# EAGLE board axiom_beta_shield_HDMI_v0.2.79a686cb (EAGLE 7.7.0)
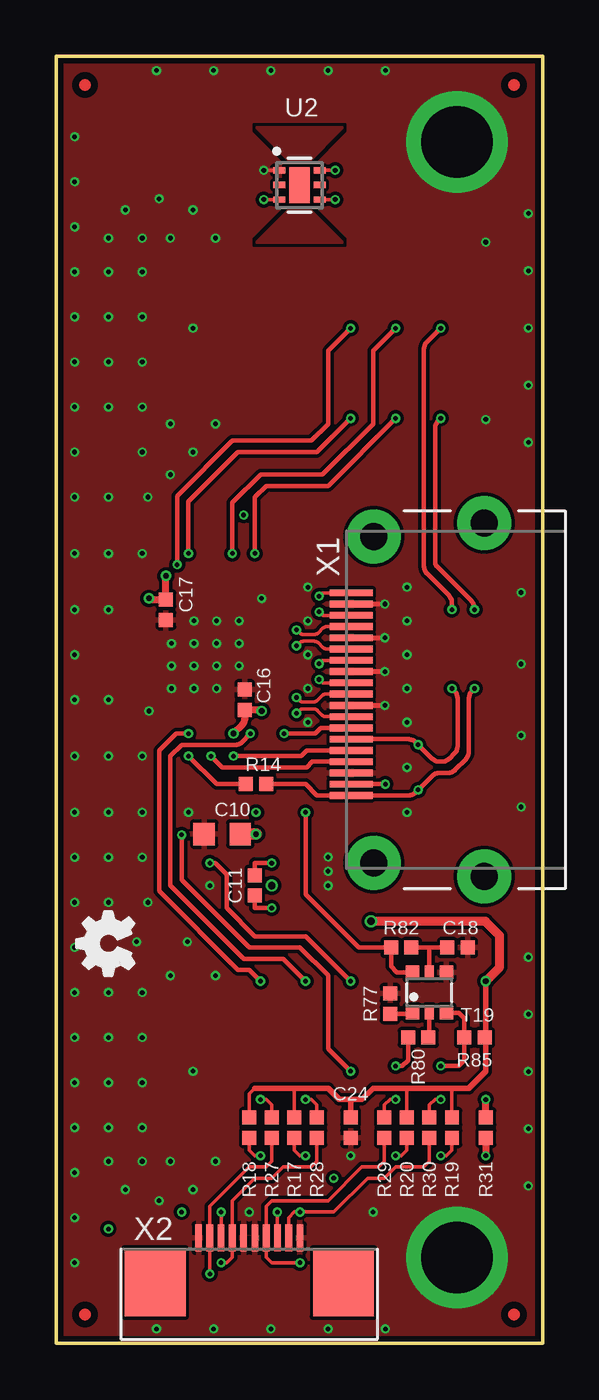
[diagram p0: board, top side]
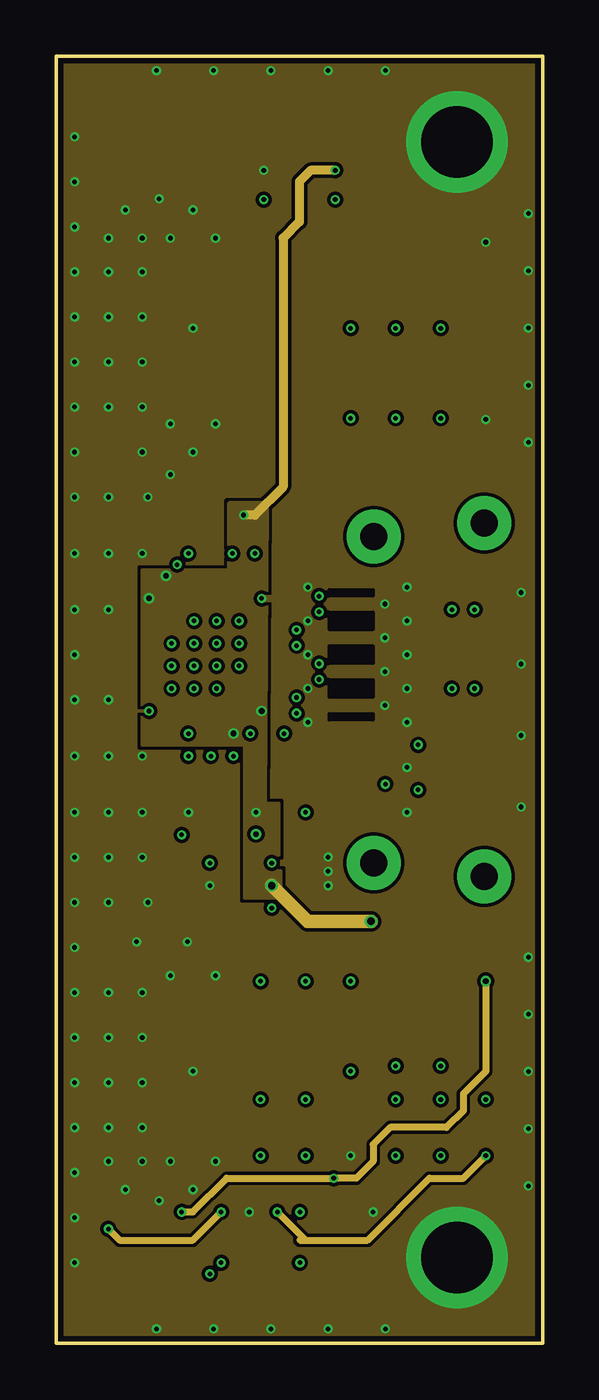
[diagram p1: board, inner layer Route2]
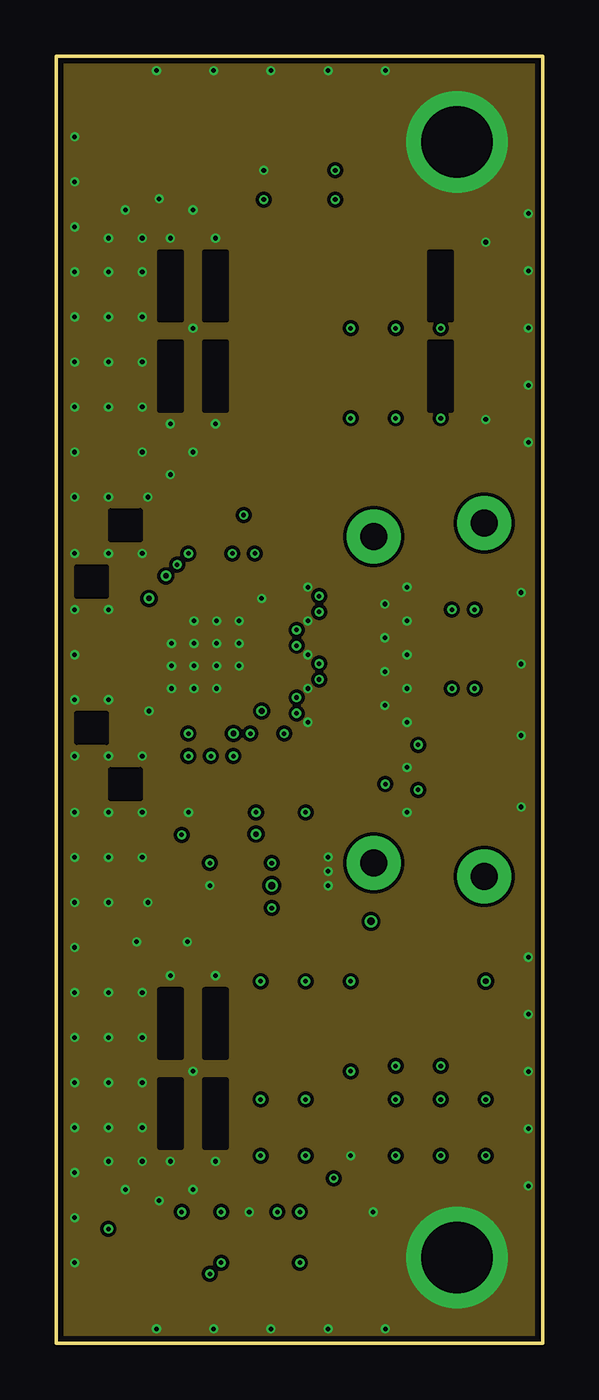
[diagram p2: board, inner layer Route15]
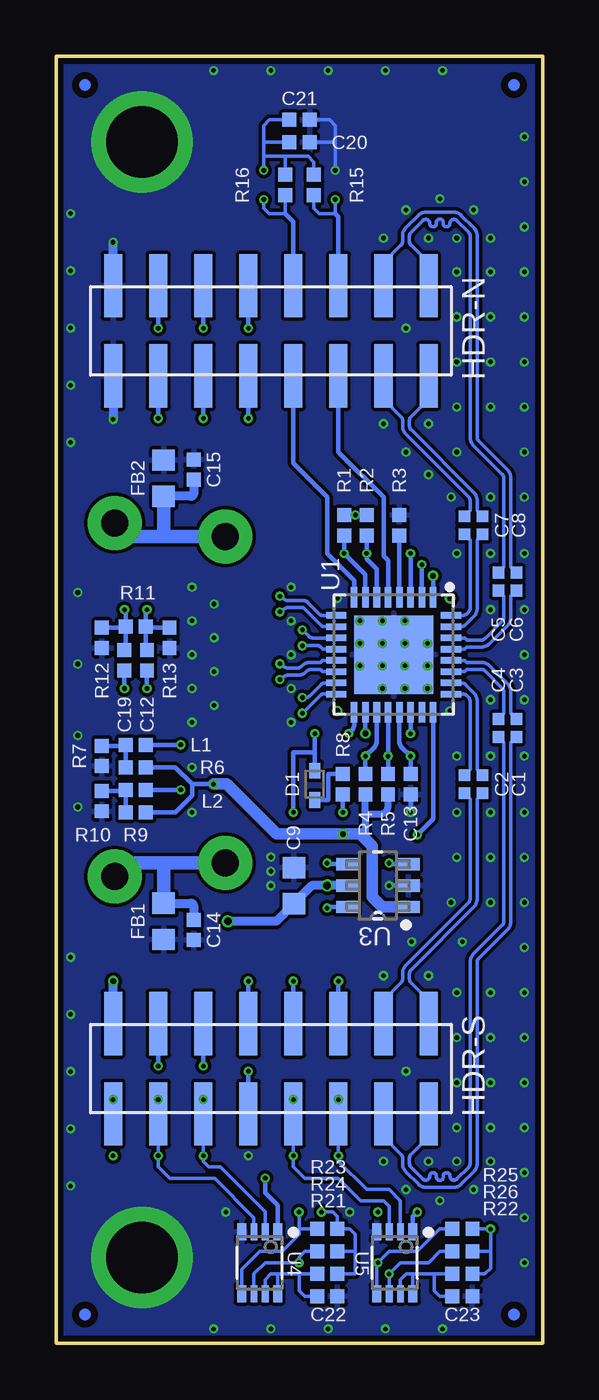
[diagram p3: board, bottom side, seen from below]

Size 21.59 x 57.15 mm. Coordinates in mm from the lower left corner, seen from the top.
Outline: 21.59,57.15 0,57.15 0,0 21.59,0 21.59,57.15
Copper layers (1*2*15*16): Top 0.035559375mm / dielectric 0.17018125mm / Route2 0.01778125mm / dielectric 47mil / Route15 0.01778125mm / dielectric 0.17018125mm / Bottom 0.035559375mm
Design rules "OSHPark-4layer-tuned *": minimum track width 5mil, minimum drill 10mil, track to track 5mil, track to pad 5mil, pad to pad 5mil, via to via 5mil, smd to smd 0mil, copper to edge 10mil, drill to drill 6mil, minimum pad ring 4mil, minimum via ring 4mil, stop-mask expansion 2mil, vias tented up to drill 50mil, thermal gap 6mil
Net classes: 0 default: width 0.152 mm, drill 0.203 mm, clearance 0.152 mm; 1 power: width 0.203 mm, drill 0.254 mm, clearance 0.203 mm; 2 LVDS: width 0.152 mm, drill 0.203 mm, clearance 0.152 mm
tKeepout: area 15.3,50.8 to 20.3,55.8; area 15.3,1.3 to 20.3,6.3
bKeepout: area 15.3,50.8 to 20.3,55.8; area 15.3,1.3 to 20.3,6.3
tRestrict: area 19.8,0.7 to 20.9,1.8; area 19.8,55.3 to 20.9,56.4; area 0.7,55.3 to 1.8,56.4; area 0.7,0.7 to 1.8,1.8; area 8.5,4.6 to 8.7,4.8
bRestrict: area 19.8,0.7 to 20.9,1.8; area 19.8,55.3 to 20.9,56.4; area 0.7,55.3 to 1.8,56.4; area 0.7,0.7 to 1.8,1.8

## Footprints (pad centres in the part's own frame; a part is rotated, then mirrored left to right if it is on the bottom)
0402-C = smd 0.52 x 0.52: 1 -0.4,0; 2 0.4,0
0603-B = smd 0.95 x 1: 1 -0.8,0; 2 0.8,0
0402-B = smd 0.62 x 0.62: 1 -0.45,0; 2 0.45,0
SOD523 = smd 0.7 x 0.5: A 0.7,0; C -0.6,0
2X08M_SMD = smd 0.8 x 2.8: 1 -7,-2; 2 -7,2; 3 -5,-2; 4 -5,2; 5 -3,-2; 6 -3,2; 7 -1,-2; 8 -1,2; 9 1,-2; 10 1,2; 11 3,-2; 12 3,2; 13 5,-2; 14 5,2; 15 7,-2; 16 7,2
SOT363 = smd 0.6 x 0.6: 1 -0.75,-0.9; 3 0.75,-0.9; 4 0.75,0.9; 6 -0.75,0.9 | smd 0.4 x 0.6: 2 0,-0.9; 5 0,0.9
HVQFN32 = smd 0.9 x 0.29: 1 -2.55,1.75; 2 -2.55,1.25; 3 -2.55,0.75; 4 -2.55,0.25; 5 -2.55,-0.25; 6 -2.55,-0.75; 7 -2.55,-1.25; 8 -2.55,-1.75; 17 2.55,-1.75; 18 2.55,-1.25; 19 2.55,-0.75; 20 2.55,-0.25; 21 2.55,0.25; 22 2.55,0.75; 23 2.55,1.25; 24 2.55,1.75 | smd 0.29 x 0.9: 9 -1.75,-2.55; 10 -1.25,-2.55; 11 -0.75,-2.55; 12 -0.25,-2.55; 13 0.25,-2.55; 14 0.75,-2.55; 15 1.25,-2.55; 16 1.75,-2.55; 25 1.75,2.55; 26 1.25,2.55; 27 0.75,2.55; 28 0.25,2.55; 29 -0.25,2.55; 30 -0.75,2.55; 31 -1.25,2.55; 32 -1.75,2.55 | smd 3.5 x 3.5: EP 0,0
CUDFN6 = smd 0.28 x 0.52: 1 -0.65,-0.9; 2 0,-0.9; 3 0.65,-0.9; 4 0.65,0.9; 5 0,0.9; 6 -0.65,0.9 | smd 1.6 x 0.9: 7 0,0
DBV = smd 0.55 x 1: 1 -0.95,-1.35; 2 0,-1.35; 3 0.95,-1.35; 4 0.95,1.35; 5 0,1.35; 6 -0.95,1.35
VSSOP-8 = smd 0.75 x 0.4: 1 -1.375,0.8; 4 -1.375,-0.8; 5 1.375,-0.8; 8 1.375,0.8 | smd 0.75 x 0.3: 2 -1.375,0.25; 3 -1.375,-0.25; 6 1.375,-0.25; 7 1.375,0.25
10029449-X01XLF = smd 0.3 x 1.9: 1 4.75,8.5; 2 4.25,8.5; 3 3.75,8.5; 4 3.25,8.5; 5 2.75,8.5; 6 2.25,8.5; 7 1.75,8.5; 8 1.25,8.5; 9 0.75,8.5; 10 0.25,8.5; 11 -0.25,8.5; 12 -0.75,8.5; 13 -1.25,8.5; 14 -1.75,8.5; 15 -2.25,8.5; 16 -2.75,8.5; 17 -3.25,8.5; 18 -3.75,8.5; 19 -4.25,8.5 | drill 1.2 pad 2.4: Z1 -7.25,7.5; Z2 -7.85,2.6; Z3 7.85,2.6; Z4 7.25,7.5
68711014022 = smd 0.3 x 1.2: 1 -2.25,0.6; 2 -1.75,0.6; 3 -1.25,0.6; 4 -0.75,0.6; 5 -0.25,0.6; 6 0.25,0.6; 7 0.75,0.6; 8 1.25,0.6; 9 1.75,0.6; 10 2.25,0.6 | smd 2.7 x 3: 11 -4.18,-1.38; 12 4.18,-1.38

## Placement (x,y rotation side)
C1  100n  [0402-C]  2.66,24.82 270 bottom
C2  100n  [0402-C]  3.46,24.82 270 bottom
C3  100n  [0402-C]  1.16,27.32 270 bottom
C4  100n  [0402-C]  1.96,27.32 270 bottom
C5  100n  [0402-C]  1.96,33.83 90 bottom
C6  100n  [0402-C]  1.16,33.83 90 bottom
C7  100n  [0402-C]  3.46,36.33 90 bottom
C8  100n  [0402-C]  2.66,36.33 90 bottom
C9  2u2  [0603-B]  11.04,20.32 90 bottom
C10  10u  [0603-B]  7.36,22.61 180 top
C11  220n  [0402-B]  8.81,20.32 90 top
C12  [0402-B]  17.56,30.32 90 bottom  (not fitted)
C13  1-10n  [0402-B]  5.86,24.82 270 bottom  (not fitted)
C14  10n  [0402-B]  15.49,18.35 270 bottom
C15  10n  [0402-B]  15.49,38.8 90 bottom
C16  100n  [0402-B]  8.36,28.57 90 top
C17  100n  [0402-B]  4.86,32.58 270 top
C18  47p  [0402-B]  17.81,17.57 0 top
C19  [0402-B]  18.56,30.32 90 bottom  (not fitted)
C20  100n  [0402-B]  10.79,53.33 0 bottom
C21  10u  [0402-B]  10.79,54.33 0 bottom
C22  100n  [0402-B]  9.56,2.07 0 bottom
C23  100n  [0402-B]  3.56,2.07 0 bottom
C24  10u  [0402-B]  13.06,9.57 270 top
D1  [SOD523]  10.12,24.82 270 bottom
FB1  [0603-B]  16.83,18.73 270 bottom
FB2  [0603-B]  16.83,38.42 90 bottom
HDR-N  [2X08M_SMD]  12.06,44.96 0 bottom  (not fitted)
HDR-S  [2X08M_SMD]  12.06,12.19 0 bottom  (not fitted)
L1  [0402-B]  18.06,26.57 180 bottom  (not fitted)
L2  [0402-B]  18.06,24.57 180 bottom  (not fitted)
LOGO1  OSHW_LOGO_FILLX0100-NT  [OSHW_FILLX100_NOTEXT]  3.44,16.34 90 top
R1  2k2  [0402-B]  8.81,36.33 270 bottom
R2  2k2  [0402-B]  7.81,36.33 270 bottom
R3  12k4  [0402-B]  6.36,36.33 90 bottom
R4  2k2  [0402-B]  7.86,24.82 90 bottom
R5  2k2  [0402-B]  6.86,24.82 90 bottom
R6  [0402-B]  18.06,25.57 180 bottom  (not fitted)
R7  [0402-B]  19.56,26.07 270 bottom  (not fitted)
R8  [0402-B]  8.86,24.82 90 bottom
R9  [0402-B]  18.06,23.57 180 bottom  (not fitted)
R10  [0402-B]  19.56,24.07 270 bottom  (not fitted)
R11  [0402-B]  18.06,31.82 180 bottom  (not fitted)
R12  [0402-B]  19.56,31.32 270 bottom  (not fitted)
R13  [0402-B]  16.56,31.32 270 bottom  (not fitted)
R14  [0402-B]  8.86,24.82 0 top  (not fitted)
R15  1k  [0402-B]  10.16,51.44 270 bottom
R16  1k  [0402-B]  11.43,51.44 270 bottom
R17  4k7  [0402-B]  10.56,9.57 270 top
R18  4k7  [0402-B]  8.56,9.57 270 top
R19  4k7  [0402-B]  17.56,9.57 270 top
R20  4k7  [0402-B]  15.56,9.57 270 top
R21  4k7  [0402-B]  9.56,3.07 180 bottom
R22  4k7  [0402-B]  3.56,3.07 180 bottom
R23  4k7  [0402-B]  9.56,5.07 180 bottom
R24  4k7  [0402-B]  9.56,4.07 180 bottom
R25  4k7  [0402-B]  3.56,5.07 180 bottom
R26  4k7  [0402-B]  3.56,4.07 180 bottom
R27  100R  [0402-B]  9.56,9.57 270 top  (not fitted)
R28  100R  [0402-B]  11.56,9.57 270 top  (not fitted)
R29  100R  [0402-B]  14.56,9.57 270 top  (not fitted)
R30  100R  [0402-B]  16.56,9.57 270 top  (not fitted)
R31  0R  [0402-B]  19.06,9.57 90 top
R77  100  [0402-B]  14.81,15.07 270 top
R80  10k  [0402-B]  16.06,13.57 180 top
R82  1M  [0402-B]  15.31,17.57 180 top
R85  100k  [0402-B]  18.56,13.57 0 top
T19  PMBT3904SY  [SOT363]  16.56,15.57 0 top
U1  PTN3363  [HVQFN32]  6.61,30.57 270 bottom
U2  NOA1305  [CUDFN6]  10.79,51.44 270 top
U3  REG710-DBV  [DBV]  7.31,20.32 90 bottom
U4  GTL2002DC  [VSSOP-8]  12.56,3.57 270 bottom
U5  GTL2002DC  [VSSOP-8]  6.56,3.57 270 bottom
U$1  AXIOM_LOGO459X70  [AXIOM_LOGO_459X70]  5.15,46.83 0 top
X1  HDMI-10029449  [10029449-X01XLF]  21.59,28.57 90 top
X2  68711014022  [68711014022]  8.56,4.07 0 top

## Library data of the parts
C1-C24 FB1 FB2 L1 L2 R1-R31 R77 R80 R82 R85 = generic-rcl
D1 = diode
HDR-N HDR-S = pincon
LOGO1 = ohw-logo
T19 = transistor
U1 = ptn3363
U2 = noa1305
U3 = reg710
U4 U5 = gtl2002
U$1 = logos_apertus_axiom
X1 = hdmi
X2 = eiCan_03_ZIF_Connectors_Flat_Flexible_Cable

## Nets
3V3: C9.1 C16.1 C17.1 C20.1 C21.1 C24.1 HDR-S.2 R1.1 R2.1 R8.1 R15.1 R16.1 R17.1 R18.1 R19.1 R20.1 R85.2 U1.1 U1.18 U2.6 U3.5 U4.1 U5.1
5V0: C10.1 R4.1 R5.1 R6.1 R9.1 U3.1 X1.18
CLOCK_N [LVDS]: U1.16 X1.12
CLOCK_P [LVDS]: U1.15 X1.10
DATA0_N [LVDS]: U1.14 X1.9
DATA0_P [LVDS]: U1.13 X1.7
DATA1_N [LVDS]: U1.12 X1.6
DATA1_P [LVDS]: U1.11 X1.4
DATA2_N [LVDS]: U1.10 X1.3
DATA2_P [LVDS]: U1.9 X1.1
GND: C9.2 C10.2 C13.2 C14.2 C15.2 C16.2 C17.2 C18.2 C20.2 C21.2 C22.2 C23.2 C24.2 FB1.2 FB2.2 HDR-N.1 HDR-N.2 R3.2 R7.2 R10.2 R12.2 R13.2 R77.1 T19.4 U1.EP U2.1 U3.2 U4.4 U5.4 X1.2 X1.5 X1.8 X1.11 X1.17 X2.1 X2.5 X2.6 X2.10
HDMI_CEC: D1.C R82.2 T19.6 X1.13
HDMI_SCL: R4.2 U1.19 X1.15
HDMI_SDA: R5.2 U1.20 X1.16
HEAC+: C12.1 L1.1 X1.14
HEAC-: C19.1 L2.1 R14.2 X1.19
HPD: C13.1 R14.1 U1.21
IN_D1_N [LVDS]: C2.1 U1.25
IN_D1_P [LVDS]: C1.1 U1.26
IN_D2_N [LVDS]: C4.1 U1.27
IN_D2_P [LVDS]: C3.1 U1.28
IN_D3_N [LVDS]: C6.1 U1.29
IN_D3_P [LVDS]: C5.1 U1.30
IN_D4_N [LVDS]: C8.1 U1.31
IN_D4_P [LVDS]: C7.1 U1.32
N$1: L1.2 R6.2 R7.1
N$2: L2.2 R9.2 R10.1
N$6: C22.1 R21.2 U4.7 U4.8
N$7: C23.1 R22.2 U5.7 U5.8
N$23: C15.1 FB2.1 X1.Z3 X1.Z4
N$24: C11.1 U3.6
N$25: C11.2 U3.4
N$26: C14.1 FB1.1 X1.Z1 X1.Z2
N$27: R3.1 U1.4
N$45: D1.A R8.2
N$100: R77.2 T19.1
N$101: C18.1 R82.1 T19.5
N$102: R80.1 T19.2
S_IO1: R26.2 R27.2 U5.6 X2.2
S_IO3: R25.2 R28.2 U5.5 X2.4
S_IO7: R24.2 R29.2 U4.6 X2.7
S_IO9: R23.2 R30.2 U4.5 X2.9
SH_N_IO0: HDR-N.12 R15.2 U2.3
SH_N_IO1: HDR-N.11 U1.5
SH_N_IO2: HDR-N.10 R16.2 U2.4
SH_N_IO3: HDR-N.9 U1.8
SH_N_IO4: HDR-N.8 U1.2
SH_N_IO5: HDR-N.7 U1.3
SH_N_IO6: HDR-N.6 R2.2 U1.6
SH_N_IO7: HDR-N.5 R1.2 U1.7
SH_N_IO8: C12.2 HDR-N.4 R11.1 R13.1
SH_N_IO9: C19.2 HDR-N.3 R11.2 R12.1
SH_S_IO0: HDR-S.12 U1.22
SH_S_IO1: HDR-S.11 R18.2 R27.1 U5.2
SH_S_IO2: HDR-S.10 U1.17
SH_S_IO3: HDR-S.9 R17.2 R28.1 U5.3
SH_S_IO4: HDR-S.8 U3.3
SH_S_IO5: HDR-S.7 U1.24
SH_S_IO6: HDR-S.6 R80.2
SH_S_IO7: HDR-S.5 R20.2 R29.1 U4.2
SH_S_IO8: HDR-S.4 R85.1 T19.3
SH_S_IO9: HDR-S.3 R19.2 R30.1 U4.3
VDD: HDR-S.1 R31.2
VIO13: R22.1 R25.1 R26.1 X2.3
VIO79: R21.1 R23.1 R24.1 R31.1 X2.8
XX1_N: C6.2 HDR-N.14
XX1_P: C5.2 HDR-N.16
XX2_N: C7.2 HDR-N.13
XX2_P: C8.2 HDR-N.15
XX3_N: C4.2 HDR-S.15
XX3_P: C3.2 HDR-S.13
XX4_N: C1.2 HDR-S.16
XX4_P: C2.2 HDR-S.14

## Tracks (layer width: path | path; a pad name or v marks a point on that pad's centre or on a via)
3V3  (via drill 0.2, 0.25, 0.33)
  Top 0.152: U2.6 v12.38,52.09 | R18.1 8.56,11.07 8.81,11.32 | R17.1 10.56,11.32 | R20.1 15.56,11.32 | R19.1 17.56,11.32
  Top 0.203: 19.06,13.62 R85.2
  Top 0.254: v19.06,16.07 19.06,13.62 19.06,12.07 18.31,11.32 17.56,11.32 15.56,11.32 14.06,11.32 13.56,10.82 13.06,10.82 | 13.06,10.82 12.56,10.82 12.06,11.32 10.56,11.32 8.81,11.32 | C24.1 13.06,10.82
  Top 0.305: v4.11,33.08 4.16,33.02 C17.1 v4.86,34.08 | v9.11,28.07 9.06,28.12 C16.1 8.36,27.73 arc-45 8.25,27.46 v7.86,27.07
  Top 0.406: v19.06,16.07 19.68,16.7 19.68,18.1 19.05,18.73 v13.97,18.73
  Route2 0.305: v5.56,5.82 6.06,5.82 7.56,7.32 v12.31,7.32 13.31,7.32 14.06,8.07 14.06,8.82 14.81,9.57 17.31,9.57 18.06,10.32 18.06,11.07 19.06,12.07 v19.06,16.07
  Route2 0.406: v12.38,52.09 11.29,52.09 10.79,51.59 10.79,49.8 10.06,49.08 10.06,38.02 R1.1 v8.31,36.77
  Route2 0.61: v9.56,20.32 11.16,18.73 v13.97,18.73
  Bottom 0.152: R16.1 11.43,52.7 | 11.43,52.7 12.38,52.7 | 12.38,52.7 v12.38,52.09 | 11.43,52.7 10.41,52.7 10.16,52.45 R15.1 | 12.38,52.7 12.38,53.34 | 12.38,53.34 C20.1 | C21.1 12.13,54.33 12.38,54.08 12.38,53.34
  Bottom 0.203: U1.18 v7.86,27.07 | U1.1 v4.86,34.08 | R2.1 v8.31,36.77 R1.1 | R8.1 v8.86,23.57 | U5.1 5.76,5.62 v5.56,5.82 | U4.1 11.76,6.12 12.31,6.68 v12.31,7.32
  Bottom 0.406: U3.5 v9.56,20.32 10.24,20.32 C9.1 11.84,18.73 v13.97,18.73 | HDR-S.2 v19.06,16.07
  pour Route2: 3.81,26.57 3.81,34.33 7.66,34.33 7.66,37.27 arc-90 7.71,37.33 9.36,37.33 9.27,23.98 9.86,23.98 9.86,21.67 9.27,21.67 9.27,20.98 9.96,20.98 9.96,19.79 8.36,19.79 8.36,26.57
5V0  (via drill 0.2, 0.25)
  Top 0.203: X1.18 v14.61,24.82
  Top 0.508: v8.86,22.61 C10.1
  Bottom 0.203: v14.61,24.82 15.56,24.82 | 15.56,24.82 16.31,25.57 R6.1 | 15.56,24.82 15.56,24.32 16.31,23.57 R9.1
  Bottom 0.305: 7.86,23.49 R4.1 | R5.1 6.86,23.84 arc90 7.21,23.49 7.86,23.49 | 7.86,23.49 7.86,22.68 7.94,22.61
  Bottom 0.508: v14.61,24.82 14.03,24.82 11.81,22.61 v8.86,22.61 8.1,22.61 | 8.1,22.61 7.94,22.61 | U3.1 7.11,19.38 7.56,19.82 7.56,22.07 8.1,22.61
CLOCK_N  (via drill 0.2)
  Top 0.152: X1.12 11.97,27.82 arc-45 11.79,27.9 11.59,28.1 arc45 11.41,28.17 10.97,28.17 arc45 10.79,28.1 v10.66,27.97
  Bottom 0.152: v10.66,27.97 9.85,28.79 arc45 9.76,28.82 U1.16
CLOCK_P  (via drill 0.2)
  Top 0.152: X1.10 11.97,28.82 arc45 11.79,28.75 11.59,28.55 arc-45 11.41,28.48 10.97,28.48 arc-45 10.79,28.55 v10.66,28.68
  Bottom 0.152: U1.15 9.66,29.32 arc-45 9.84,29.25 10.34,28.75 arc45 10.52,28.68 v10.66,28.68
DATA0_N  (via drill 0.2)
  Top 0.152: X1.9 11.87,29.32 arc-45 11.78,29.36 v11.66,29.47
  Bottom 0.152: v11.66,29.47 11.54,29.56 arc45 11.27,29.67 10.81,29.67 arc-45 10.54,29.78 10.51,29.81 arc45 10.24,29.92 9.92,29.92 arc45 9.83,29.88 9.8,29.86 arc-45 9.71,29.82 U1.14
DATA0_P  (via drill 0.2)
  Top 0.152: X1.7 11.87,30.32 arc45 11.78,30.29 v11.66,30.18
  Bottom 0.152: v11.66,30.18 11.54,30.09 arc-45 11.27,29.98 10.94,29.98 arc-45 10.67,30.09 10.64,30.12 arc45 10.37,30.23 9.92,30.23 arc-45 9.83,30.27 9.8,30.29 arc45 9.71,30.32 U1.13
DATA1_N  (via drill 0.2)
  Top 0.152: X1.6 12.02,30.82 arc-45 11.84,30.9 11.64,31.1 arc45 11.46,31.17 10.97,31.17 arc45 10.79,31.1 v10.66,30.97
  Bottom 0.152: U1.12 9.71,30.82 arc45 9.8,30.86 9.88,30.94 arc-45 9.97,30.97 v10.66,30.97
DATA1_P  (via drill 0.2)
  Top 0.152: X1.4 12.02,31.82 arc45 11.84,31.75 11.64,31.55 arc-45 11.46,31.48 10.97,31.48 arc-45 10.79,31.55 v10.66,31.68
  Bottom 0.152: U1.11 10.21,31.32 arc45 10.39,31.4 v10.66,31.68
DATA2_N  (via drill 0.2)
  Top 0.152: X1.3 11.87,32.33 arc-45 11.78,32.36 v11.66,32.48
  Bottom 0.152: v11.66,32.48 11.54,32.56 arc45 11.27,32.67 10.68,32.67 arc45 10.59,32.63 9.82,31.86 arc-45 9.73,31.82 U1.10
DATA2_P  (via drill 0.2)
  Top 0.152: X1.1 11.87,33.33 arc45 11.78,33.29 v11.66,33.17
  Bottom 0.152: v11.66,33.17 11.54,33.09 arc-45 11.27,32.98 10.61,32.98 arc45 10.43,32.9 9.89,32.36 arc-45 9.8,32.33 U1.9
GND  (via drill 0.2, 3.17 pad 4.5)
  Top 0.152: U2.1 v9.21,52.09
  Top 0.203: X1.2 v14.58,32.83 | X1.5 v14.58,31.32 | X1.8 v14.58,29.82 | X1.11 v14.58,28.32
  Bottom 0.152: v9.21,52.09 9.21,53.34 | 9.21,53.34 C20.2 | 9.21,53.34 9.21,54.08 9.46,54.33 C21.2
  Bottom 0.203: U3.2 v6.81,20.32 | C13.2 v5.86,23.57
  Bottom 0.406: HDR-N.2 v19.06,48.89 | HDR-N.1 v19.06,41.02
  Bottom 0.457: v6.11,31.07 U1.EP
  other vias: 17.78,3.81 17.78,53.34 20.95,50.16 20.95,47.62 20.95,45.09 20.95,42.55 20.95,40 20.95,17.14 20.95,14.6 20.95,12.06 20.95,9.52 20.95,6.98 14.61,0.63 12.06,0.63 9.52,0.63 6.98,0.63 4.44,0.63 14.61,56.52 12.06,56.52 9.52,56.52 6.98,56.52 4.44,56.52 20.64,30.16 20.64,26.99 20.64,23.81 20.64,33.34 11.16,29.07 11.16,30.57 11.16,32.08 11.16,27.57 11.16,33.58 4.11,28.07 9.11,33.08 6.11,30.07 7.11,31.07 7.11,30.07 15.56,27.57 15.56,23.57 15.56,30.57 15.56,33.58 5.11,29.07 8.11,32.08 8.11,31.07 6.11,29.07 5.11,30.07 7.11,32.08 5.11,31.07 6.11,32.08 7.11,29.07 8.11,30.07 15.56,29.07 15.56,32.08 15.56,25.57 0.81,39.58 2.31,41.58 0.81,37.58 0.81,35.08 2.31,32.58 2.31,35.08 3.81,35.08 4.06,37.58 2.31,37.58 0.81,32.58 0.81,30.57 0.81,28.57 2.31,28.57 0.81,26.07 2.31,26.07 3.81,26.07 2.31,23.57 3.81,23.57 3.81,21.57 2.31,21.57 0.81,21.57 0.81,23.57 3.81,41.58 3.81,39.58 2.31,43.58 3.81,43.58 2.31,45.58 3.81,45.58 2.31,47.58 3.81,47.58 3.81,49.08 2.31,49.08 3.06,50.33 6.06,50.33 7.06,49.08 6.06,45.08 6.06,39.58 5.06,38.58 7.06,40.83 5.06,40.83 5.06,49.08 4.56,50.83 2.31,15.57 3.81,15.57 3.56,17.82 2.31,13.57 3.81,13.57 2.31,11.57 3.81,11.57 2.31,9.57 3.81,9.57 3.81,8.07 2.31,8.07 3.06,6.82 6.06,6.82 7.06,8.07 6.06,12.07 5.81,17.82 7.06,16.32 5.06,16.32 5.06,8.07 4.56,6.32 4.06,19.57 2.31,19.57 0.81,19.57 0.81,17.57 0.81,15.57 0.81,13.57 0.81,11.57 0.81,9.57 0.81,7.57 0.81,5.57 0.81,3.57 0.81,41.58 0.81,43.58 0.81,45.58 0.81,47.58 0.81,49.58 0.81,51.58 0.81,53.58 12.06,20.32 12.06,20.95 12.06,21.59 13.06,8.32 14.06,5.82 8.56,5.82
  pour Top (rank 3): 21.59,0 0,0 0,57.15 21.59,57.15
  pour Bottom (rank 3): 21.59,0 0,0 0,57.15 21.59,57.15
  pour Route2 (rank 3): 21.59,0 0,0 0,57.15 21.59,57.15
  pour Route15 (rank 3): 21.59,0 0,0 0,57.15 21.59,57.15
  cutout Route2: 12.12,33.48 14.06,33.48 14.06,33.17 12.12,33.17
  cutout Route2: 12.12,27.97 14.06,27.97 14.06,27.68 12.12,27.68
  cutout Route2: 12.12,29.47 14.06,29.47 14.06,28.68 12.12,28.68
  cutout Route2: 12.12,30.97 14.06,30.97 14.06,30.18 12.12,30.18
  cutout Route2: 12.12,32.48 14.06,32.48 14.06,31.68 12.12,31.68
  cutout Route15: 3.76,36.98 3.76,35.67 arc-90 3.71,35.62 2.41,35.62 arc-90 2.37,35.67 2.37,36.98 arc-90 2.41,37.02 3.71,37.02 arc-90
  cutout Route15: 2.26,34.48 2.26,33.17 arc-90 2.21,33.12 0.91,33.12 arc-90 0.87,33.17 0.87,34.48 arc-90 0.91,34.52 2.21,34.52 arc-90
  cutout Route15: 2.26,27.97 2.26,26.68 arc-90 2.21,26.62 0.91,26.62 arc-90 0.87,26.68 0.87,27.97 arc-90 0.91,28.02 2.21,28.02 arc-90
  cutout Route15: 3.76,25.47 3.76,24.17 arc-90 3.71,24.12 2.41,24.12 arc-90 2.37,24.17 2.37,25.47 arc-90 2.41,25.52 3.71,25.52 arc-90
HDMI_CEC  (via drill 0.2)
  Top 0.203: X1.13 11.74,27.32 11.49,27.07 v10.12,27.07 | T19.6 15.11,16.48 14.86,16.73 R82.2 13.43,17.57 11.06,19.94 v11.06,23.57
  Bottom 0.203: v10.12,27.07 10.12,26.24 | 10.12,26.24 D1.C | 10.12,26.24 11.06,26.24 v11.06,23.57
HDMI_SCL  (via drill 0.2)
  Top 0.203: X1.15 11.12,26.32 10.87,26.07 v7.86,26.07
  Bottom 0.203: U1.19 7.36,26.73 arc45 7.48,26.46 v7.86,26.07 R4.2
HDMI_SDA  (via drill 0.2)
  Top 0.203: X1.16 11.37,25.82 11.12,25.57 7.36,25.57 v6.86,26.07
  Bottom 0.203: U1.20 v6.86,26.07 R5.2
HEAC+  (via drill 0.2)
  Top 0.203: X1.14 15.61,26.82 arc-45 15.96,26.68 v16.06,26.57 16.67,25.97 arc45 17.02,25.82 17.11,25.82 arc45 17.46,25.97 17.67,26.18 arc45 17.81,26.53 17.81,28.62 arc45 17.67,28.97 v17.56,29.07
  Bottom 0.203: L1.1 v16.06,26.57 | v17.56,29.07 C12.1
HEAC-  (via drill 0.2)
  Top 0.203: R14.2 11.06,24.82 11.56,24.32 X1.19 15.61,24.32 arc45 15.96,24.47 v16.06,24.57 16.67,25.18 arc-45 17.02,25.32 17.36,25.32 arc45 17.71,25.47 18.17,25.93 arc45 18.31,26.28 18.31,28.62 arc-45 18.46,28.97 v18.56,29.07
  Bottom 0.203: L2.1 v16.06,24.57 | v18.56,29.07 C19.1
HPD  (via drill 0.2)
  Top 0.203: v5.86,26.07 7.11,24.82 R14.1
  Bottom 0.203: C13.1 v5.86,26.07 6.25,26.46 arc45 6.36,26.73 U1.21
IN_D1_N
  Bottom 0.152: C2.1 3.22,25.47 3.22,28.51 arc-45 3.29,28.68 3.36,28.75 arc-45 3.53,28.82 U1.25
IN_D1_P
  Bottom 0.152: C1.1 2.91,25.47 2.91,28.53 arc-45 3.06,28.88 3.43,29.25 arc-45 3.6,29.32 U1.26
IN_D2_N
  Bottom 0.152: C4.1 1.72,27.97 1.72,28.91 arc-45 1.79,29.09 2.55,29.85 arc-45 2.73,29.92 3.37,29.92 3.46,29.82 U1.27
IN_D2_P
  Bottom 0.152: C3.1 1.41,27.97 1.41,28.93 arc-45 1.56,29.29 2.35,30.08 arc-45 2.71,30.23 3.37,30.23 3.46,30.32 U1.28
IN_D3_N
  Bottom 0.152: U1.29 3.46,30.82 3.37,30.92 2.71,30.92 arc-45 2.35,31.07 1.56,31.86 arc-45 1.41,32.22 1.41,33.18 C6.1
IN_D3_P
  Bottom 0.152: U1.30 3.46,31.32 3.37,31.23 2.73,31.23 arc-45 2.55,31.3 1.79,32.06 arc-45 1.72,32.24 1.72,33.18 C5.1
IN_D4_N
  Bottom 0.152: C8.1 2.91,35.68 2.91,32.62 arc45 3.06,32.27 3.43,31.9 arc45 3.6,31.82 U1.31
IN_D4_P
  Bottom 0.152: C7.1 3.22,35.68 3.22,32.66 arc45 3.3,32.45 3.36,32.4 arc45 3.53,32.33 U1.32
N$1
  Bottom 0.203: R6.2 L1.2 18.56,26.52 R7.1
N$2
  Bottom 0.203: R9.2 L2.2 18.56,24.52 R10.1
N$3
  pour Top: 10.48,50.48 10.48,52.39 8.89,53.97 12.7,53.97 11.11,52.39 11.11,50.48 12.7,48.89 8.89,48.89
N$6
  Bottom 0.152: 10.81,3.07 R21.2 | 10.81,3.07 10.81,2.32 10.56,2.07 C22.1 | 11.76,3.07 12.06,3.07 12.31,2.82 U4.7 | 10.81,3.07 11.56,3.07 11.76,3.07 | U4.8 11.76,3.07
N$7
  Bottom 0.152: 5.76,3.07 6.06,3.07 6.31,2.82 U5.7 | 5.76,3.07 4.81,3.07 | 4.81,3.07 R22.2 | U5.8 5.76,3.07 | 4.81,3.07 4.81,2.32 4.56,2.07 C23.1
N$21
  cutout Route15: 5.56,15.67 5.56,12.72 arc-90 5.51,12.67 4.61,12.67 arc-90 4.56,12.72 4.56,15.67 arc-90 4.61,15.72 5.51,15.72 arc-90
  cutout Route15: 6.56,12.72 6.56,15.67 arc-90 6.61,15.72 7.51,15.72 arc-90 7.56,15.67 7.56,12.72 arc-90 7.51,12.67 6.61,12.67 arc-90
  cutout Route15: 7.51,8.68 6.61,8.68 arc-90 6.56,8.72 6.56,11.68 arc-90 6.61,11.72 7.51,11.72 arc-90 7.56,11.68 7.56,8.72 arc-90
  cutout Route15: 4.56,8.72 4.56,11.68 arc-90 4.61,11.72 5.51,11.72 arc-90 5.56,11.68 5.56,8.72 arc-90 5.51,8.68 4.61,8.68 arc-90
  cutout Route15: 5.56,45.42 4.56,45.42 4.56,48.47 5.56,48.47
  cutout Route15: 7.56,45.42 6.56,45.42 6.56,48.47 7.56,48.47
  cutout Route15: 7.56,41.42 6.56,41.42 6.56,44.48 7.56,44.48
  cutout Route15: 5.56,41.42 4.56,41.42 4.56,44.48 5.56,44.48
  cutout Route15: 17.56,45.42 16.56,45.42 16.56,48.47 17.56,48.47
  cutout Route15: 17.56,41.42 16.56,41.42 16.56,44.48 17.56,44.48
N$23
  Bottom 0.406: 15.56,35.83 16.51,35.83 | C15.1 15.49,37.74 arc90 15.62,37.62 FB2.1
  Bottom 0.61: X1.Z3 18.54,35.97 arc-45 18.18,35.83 16.83,35.83 | 16.83,35.83 16.51,35.83 X1.Z4 | 16.83,35.83 FB2.1 16.83,37.59
N$24  (via drill 0.2)
  Top 0.203: C11.1 8.81,19.32 v9.56,19.32
  Bottom 0.203: U3.6 9.52,19.38 v9.56,19.32
N$25  (via drill 0.2)
  Top 0.203: C11.2 8.81,21.32 v9.56,21.32
  Bottom 0.203: U3.4 9.52,21.27 v9.56,21.32
N$26
  Bottom 0.406: FB1.1 15.62,19.53 arc90 15.49,19.41 C14.1
  Bottom 0.61: X1.Z2 18.54,21.18 arc45 18.18,21.32 16.95,21.32 | 16.95,21.32 X1.Z1 | FB1.1 16.83,21.2 arc-90 16.95,21.32
N$27
  Bottom 0.203: U1.4 R3.1
N$45
  Bottom 0.203: R8.2 9.52,25.27 9.52,24.12 D1.A
N$100
  Top 0.203: T19.1 15.77,14.62 R77.2
N$101
  Top 0.203: T19.5 16.56,17.57 | 16.56,17.57 C18.1 | 16.56,17.57 R82.1
N$102
  Top 0.203: T19.2 16.56,13.62 R80.1
S_IO1  (via drill 0.2)
  Top 0.152: R27.2 9.56,8.07 9.31,7.82 8.56,7.82 6.81,6.07 X2.2 v6.81,3.07
  Bottom 0.152: U5.6 v6.81,3.07 6.31,3.57 5.06,3.57 4.56,4.07 R26.2
S_IO3  (via drill 0.2)
  Top 0.152: R28.2 11.56,8.07 11.31,7.82 10.06,7.82 9.56,7.32 8.81,7.32 7.81,6.32 X2.4 7.81,3.82 7.56,3.57 v7.31,3.57
  Bottom 0.152: U5.5 7.36,3.52 v7.31,3.57 6.81,4.07 5.56,4.07 4.56,5.07 R25.2
S_IO7  (via drill 0.2)
  Top 0.152: R29.2 14.56,8.07 14.31,7.82 13.56,7.82 12.06,6.32 9.56,6.32 9.31,6.07 X2.7 9.31,3.82 9.56,3.57 v10.81,3.57
  Bottom 0.152: R24.2 10.56,4.07 10.81,3.82 v10.81,3.57 12.31,3.57 12.81,3.07 U4.6
S_IO9  (via drill 0.2)
  Top 0.152: R30.2 16.56,8.07 16.31,7.82 15.06,7.82 14.56,7.32 13.81,7.32 12.31,5.82 v10.81,5.82 10.56,5.82 10.31,5.57 X2.9
  Bottom 0.152: 10.81,5.07 R23.2 | U4.5 13.37,3.27 12.56,4.07 11.56,4.07 10.81,4.82 10.81,5.07 | 10.81,5.07 v10.81,5.82
SH_N_IO0  (via drill 0.2)
  Top 0.152: U2.3 v9.21,50.78
  Bottom 0.152: R15.2 10.16,50.41 9.91,50.16 9.21,50.16 v9.21,50.78
  Bottom 0.203: 9.21,50.16 9.06,50.02 HDR-N.12
SH_N_IO1
  Bottom 0.203: U1.5 6.86,34.75 7.06,34.95 7.06,37.58 9.06,39.58 HDR-N.11
SH_N_IO2  (via drill 0.2)
  Top 0.152: U2.4 v12.38,50.78
  Bottom 0.152: R16.2 11.43,50.16 12.13,50.16 12.38,50.41 v12.38,50.78
  Bottom 0.203: 11.43,50.16 11.06,49.8 HDR-N.10
SH_N_IO3
  Bottom 0.203: U1.8 8.36,33.88 9.56,35.08 9.56,37.58 11.06,39.08 HDR-N.9
SH_N_IO4  (via drill 0.2)
  Top 0.203: v5.36,34.58 5.36,37.62 7.81,40.08 11.31,40.08 12.06,40.83 12.06,44.08 v13.06,45.08
  Bottom 0.203: U1.2 v5.36,34.58 | HDR-N.8 v13.06,45.08
SH_N_IO5  (via drill 0.2)
  Top 0.203: v5.86,35.08 5.86,37.38 8.06,39.58 11.56,39.58 v13.06,41.08
  Bottom 0.203: U1.3 v5.86,35.08 | HDR-N.7 v13.06,41.08
SH_N_IO6  (via drill 0.2)
  Top 0.203: v7.81,35.08 7.81,37.33 9.06,38.58 11.81,38.58 14.06,40.83 14.06,44.08 v15.06,45.08
  Bottom 0.203: U1.6 7.36,34.38 7.81,34.83 v7.81,35.08 R2.2 | HDR-N.6 v15.06,45.08
SH_N_IO7  (via drill 0.2)
  Top 0.203: v8.81,35.08 8.81,37.58 9.31,38.08 12.06,38.08 v15.06,41.08
  Bottom 0.203: R1.2 v8.81,35.08 7.86,34.12 U1.7 | HDR-N.5 v15.06,41.08
SH_N_IO8  (via drill 0.2)
  Top 0.203: v17.56,32.58 17.56,32.87 arc45 17.42,33.22 16.46,34.18 arc-45 16.31,34.53 16.31,44.12 arc-45 16.46,44.47 v17.06,45.08
  Bottom 0.203: C12.2 17.61,30.82 R11.1 | R11.1 17.56,31.77 R13.1 | R11.1 17.61,32.52 v17.56,32.58 | HDR-N.4 v17.06,45.08
SH_N_IO9  (via drill 0.2)
  Top 0.203: v18.56,32.58 18.56,32.62 arc45 18.42,32.97 16.89,34.5 arc-45 16.81,34.68 16.81,40.62 arc-45 16.96,40.97 v17.06,41.08
  Bottom 0.203: C19.2 18.52,30.82 R11.2 | R11.2 18.56,31.77 R12.1 | R11.2 18.52,32.52 v18.56,32.58 | HDR-N.3 v17.06,41.08
SH_S_IO0  (via drill 0.2)
  Top 0.203: v5.86,27.07 5.31,27.07 4.56,26.32 4.56,20.07 8.06,16.57 8.56,16.57 v9.06,16.07
  Bottom 0.203: U1.22 v5.86,27.07 | HDR-S.12 v9.06,16.07
SH_S_IO1  (via drill 0.2)
  Top 0.152: R27.1 9.56,10.57 9.31,10.82 v9.06,10.82 | R18.2 8.56,8.57 8.81,8.32 v9.06,8.32
  Bottom 0.152: v9.06,10.82 HDR-S.11 v9.06,8.32 9.06,8.07 7.81,6.82 6.81,6.82 6.31,6.32 U5.2
SH_S_IO2  (via drill 0.2)
  Top 0.203: v8.61,27.07 8.23,26.69 arc-45 7.96,26.57 5.56,26.57 5.06,26.07 5.06,20.32 8.31,17.07 10.06,17.07 v11.06,16.07
  Bottom 0.203: U1.17 8.36,27.48 arc45 8.48,27.21 v8.61,27.07 | HDR-S.10 v11.06,16.07
SH_S_IO3  (via drill 0.2)
  Top 0.152: R28.1 11.56,10.57 11.31,10.82 v11.06,10.82 | R17.2 10.56,8.57 10.81,8.32 v11.06,8.32
  Bottom 0.152: v11.06,10.82 HDR-S.9 v11.06,8.32 11.06,7.82 10.56,7.32 9.06,7.32 8.06,6.32 7.06,6.32 6.81,6.07 U5.3
SH_S_IO4  (via drill 0.2)
  Top 0.203: v13.06,16.07 11.06,18.07 8.81,18.07 7.56,19.32 7.56,20.82 7.06,21.32 v6.81,21.32
  Bottom 0.203: HDR-S.8 v13.06,16.07 | U3.3 6.76,21.27 v6.81,21.32
SH_S_IO5  (via drill 0.2)
  Top 0.203: v5.56,22.57 5.56,20.57 8.56,17.57 10.81,17.57 12.06,16.32 12.06,13.07 v13.06,12.07
  Bottom 0.203: U1.24 4.86,23.27 v5.56,22.57 | HDR-S.7 v13.06,12.07
SH_S_IO6  (via drill 0.2)
  Top 0.203: R80.2 15.61,12.56 15.36,12.31 v15.06,12.31
  Bottom 0.203: v15.06,12.31 HDR-S.6
SH_S_IO7  (via drill 0.2)
  Top 0.152: R29.1 14.56,10.57 14.81,10.82 v15.06,10.82 | R20.2 15.56,8.57 15.31,8.32 v15.06,8.32
  Bottom 0.152: v15.06,10.82 HDR-S.5 v15.06,8.32 15.06,8.07 14.81,7.82 14.31,7.82 12.31,5.82 U4.2
SH_S_IO8  (via drill 0.2)
  Top 0.203: T19.3 17.86,14.67 18.11,14.42 R85.1 18.11,12.56 17.86,12.31 v17.06,12.31
  Bottom 0.203: v17.06,12.31 HDR-S.4
SH_S_IO9  (via drill 0.2)
  Top 0.152: R30.1 16.56,10.57 16.81,10.82 v17.06,10.82 | R19.2 17.56,8.57 17.31,8.32 v17.06,8.32
  Bottom 0.152: v17.06,10.82 HDR-S.3 v17.06,8.32 17.06,7.82 16.56,7.32 14.56,7.32 12.81,5.57 U4.3
VDD  (via drill 0.2)
  Top 0.305: R31.2 v19.06,10.82
  Bottom 0.305: HDR-S.1 v19.06,10.82
VIO13  (via drill 0.2)
  Top 0.152: v7.31,5.82 X2.3
  Route2 0.305: v2.31,5.07 2.81,4.57 6.06,4.57 v7.31,5.82
  Bottom 0.152: R22.1 2.56,3.07 2.31,3.32 2.31,4.07 | 2.31,4.07 R26.1 | R25.1 v2.31,5.07 2.31,4.07
VIO79  (via drill 0.2)
  Top 0.152: v9.81,5.82 X2.8
  Top 0.305: R31.1 v19.06,8.32
  Route2 0.305: 10.81,4.57 11.06,4.57 | 11.06,4.57 13.81,4.57 16.56,7.32 18.06,7.32 v19.06,8.32 | 11.06,4.57 v9.81,5.82
  Bottom 0.152: R21.1 8.31,3.07 8.31,4.07 | 8.31,4.07 8.31,4.82 8.56,5.07 R23.1 9.11,5.62 9.31,5.82 v9.81,5.82 | R24.1 8.31,4.07
XX1_N
  Bottom 0.152: C6.2 1.41,34.47 1.41,38.43 arc-45 1.56,38.78 2.84,40.06 arc45 2.91,40.24 2.91,49.18 arc-45 3.06,49.53 3.6,50.08 arc-45 3.96,50.23 5.17,50.23 arc-45 5.52,50.08 6.07,49.53 arc-45 6.22,49.18 6.22,48.93 arc45 6.29,48.75 7.06,47.98 HDR-N.14
XX1_P
  Bottom 0.152: C5.2 1.72,34.47 1.72,38.41 arc-45 1.79,38.59 3.07,39.86 arc45 3.22,40.22 3.22,49.16 arc-45 3.29,49.34 3.81,49.85 arc-140 4.11,49.72 arc90 4.26,49.58 arc90 4.41,49.72 4.41,49.77 arc-90 4.56,49.92 arc-90 4.71,49.77 4.71,49.72 arc90 4.86,49.58 arc90 5.01,49.72 arc-140 5.32,49.85 5.84,49.34 arc-45 5.91,49.16 5.91,48.93 arc-45 5.84,48.75 5.06,47.98 HDR-N.16
XX2_N
  Bottom 0.152: C7.2 3.22,36.97 3.22,37.41 arc-45 3.29,37.59 6.07,40.36 arc45 6.22,40.72 6.22,40.97 arc-45 6.29,41.15 7.06,41.92 HDR-N.13
XX2_P
  Bottom 0.152: C8.2 2.91,36.97 2.91,37.43 arc-45 3.06,37.78 5.84,40.56 arc45 5.91,40.74 5.91,40.97 arc45 5.84,41.15 5.06,41.92 HDR-N.15
XX3_N
  Bottom 0.152: C4.2 1.72,26.68 1.72,18.74 arc45 1.79,18.56 3.07,17.29 arc-45 3.22,16.93 3.22,7.99 arc45 3.29,7.81 3.81,7.3 arc140 4.11,7.43 arc-90 4.26,7.57 arc-90 4.41,7.43 4.41,7.38 arc90 4.56,7.23 arc90 4.71,7.38 4.71,7.43 arc-90 4.86,7.57 arc-90 5.01,7.43 arc140 5.32,7.3 5.84,7.81 arc45 5.91,7.99 5.91,8.22 arc45 5.84,8.4 5.06,9.17 HDR-S.15
XX3_P
  Bottom 0.152: C3.2 1.41,26.68 1.41,18.72 arc45 1.56,18.36 2.84,17.09 arc-45 2.91,16.91 2.91,7.97 arc45 3.06,7.61 3.6,7.07 arc45 3.96,6.92 5.17,6.92 arc45 5.52,7.07 6.07,7.61 arc45 6.22,7.97 6.22,8.22 arc-45 6.29,8.4 7.06,9.17 HDR-S.13
XX4_N
  Bottom 0.152: C1.2 2.91,24.18 2.91,19.72 arc45 3.06,19.36 5.84,16.59 arc-45 5.91,16.41 5.91,16.18 arc-45 5.84,16 5.06,15.23 HDR-S.16
XX4_P
  Bottom 0.152: C2.2 3.22,24.18 3.22,19.74 arc45 3.29,19.56 6.07,16.79 arc-45 6.22,16.43 6.22,16.18 arc45 6.29,16 7.06,15.23 HDR-S.14
(copper drawn outside any net)
  shapes: Bottom circle x4, Top circle x4

## Text on the board
_tSilk: V0.2 / R1.0 | HDMI Shield | Copyright (C) 2017 H. Pötzl / Licensed under CERN OHL v.1.2
tEngrave: AXIOM BETA HDMI SHIELD / TOP SIDE V0.2 R1.0
bEngrave: AXIOM BETA HDMI SHIELD / BOTTOM SIDE V0.2 R1.0